# Altium PCB G118_9563_Demo.PcbDoc
Units mm, origin at the board's own origin, x right, y up, seen from the top; angles counter-clockwise.
Board outline 134.11 x 69.34 mm, 2 copper layers (Top Layer, Bottom Layer); 102 components, 94 nets, 337 pads, 209 vias.
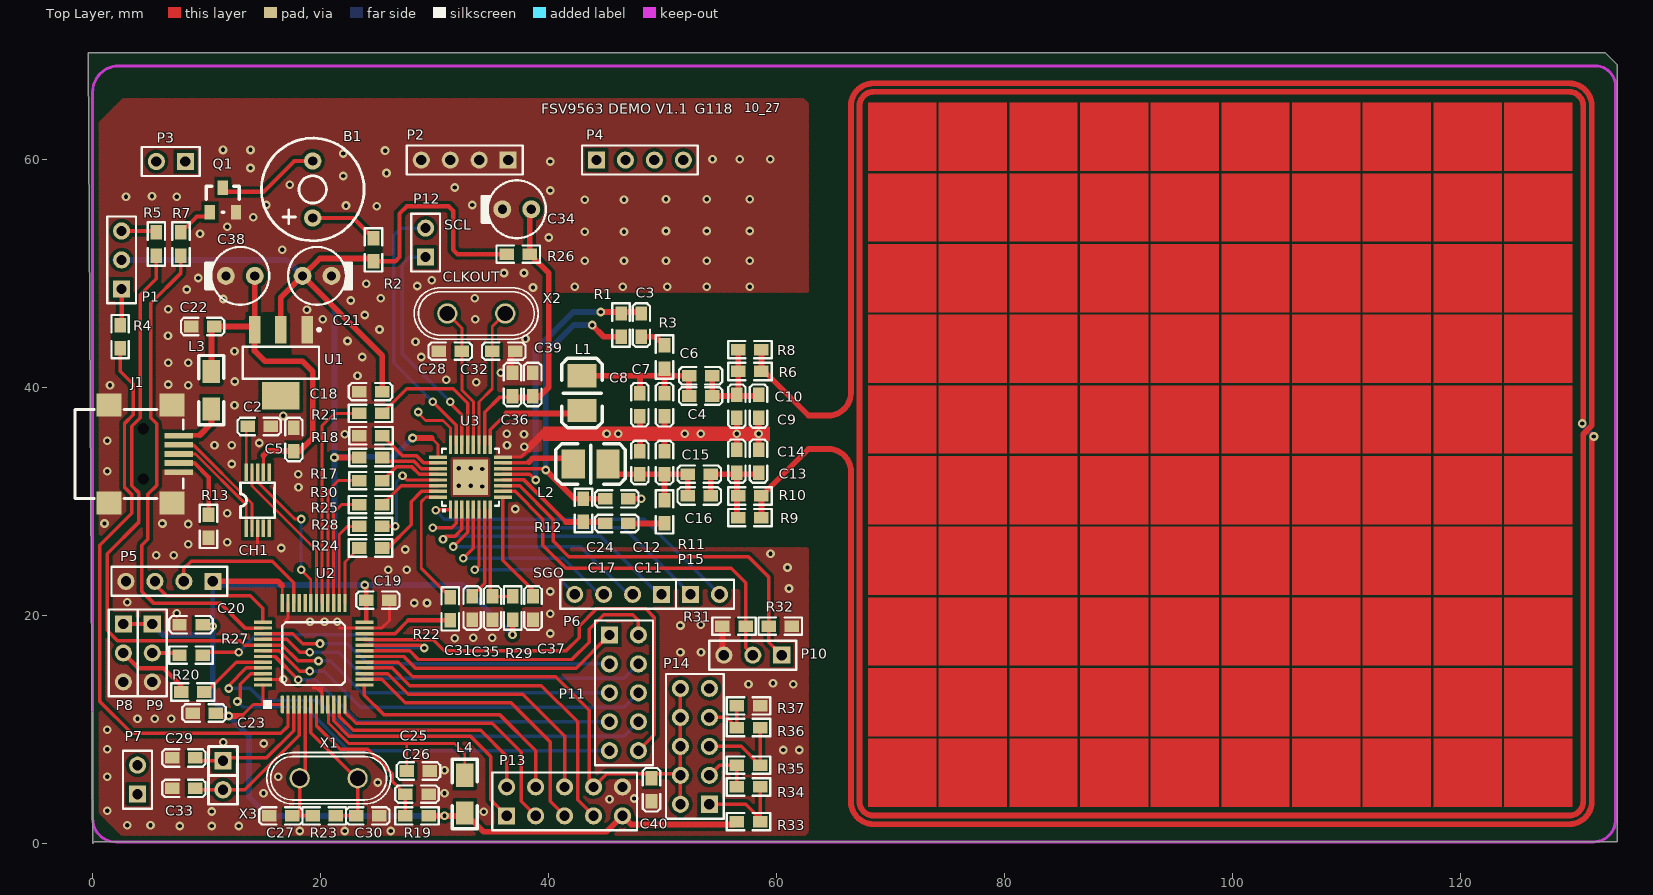
[diagram p0: Top Layer view]
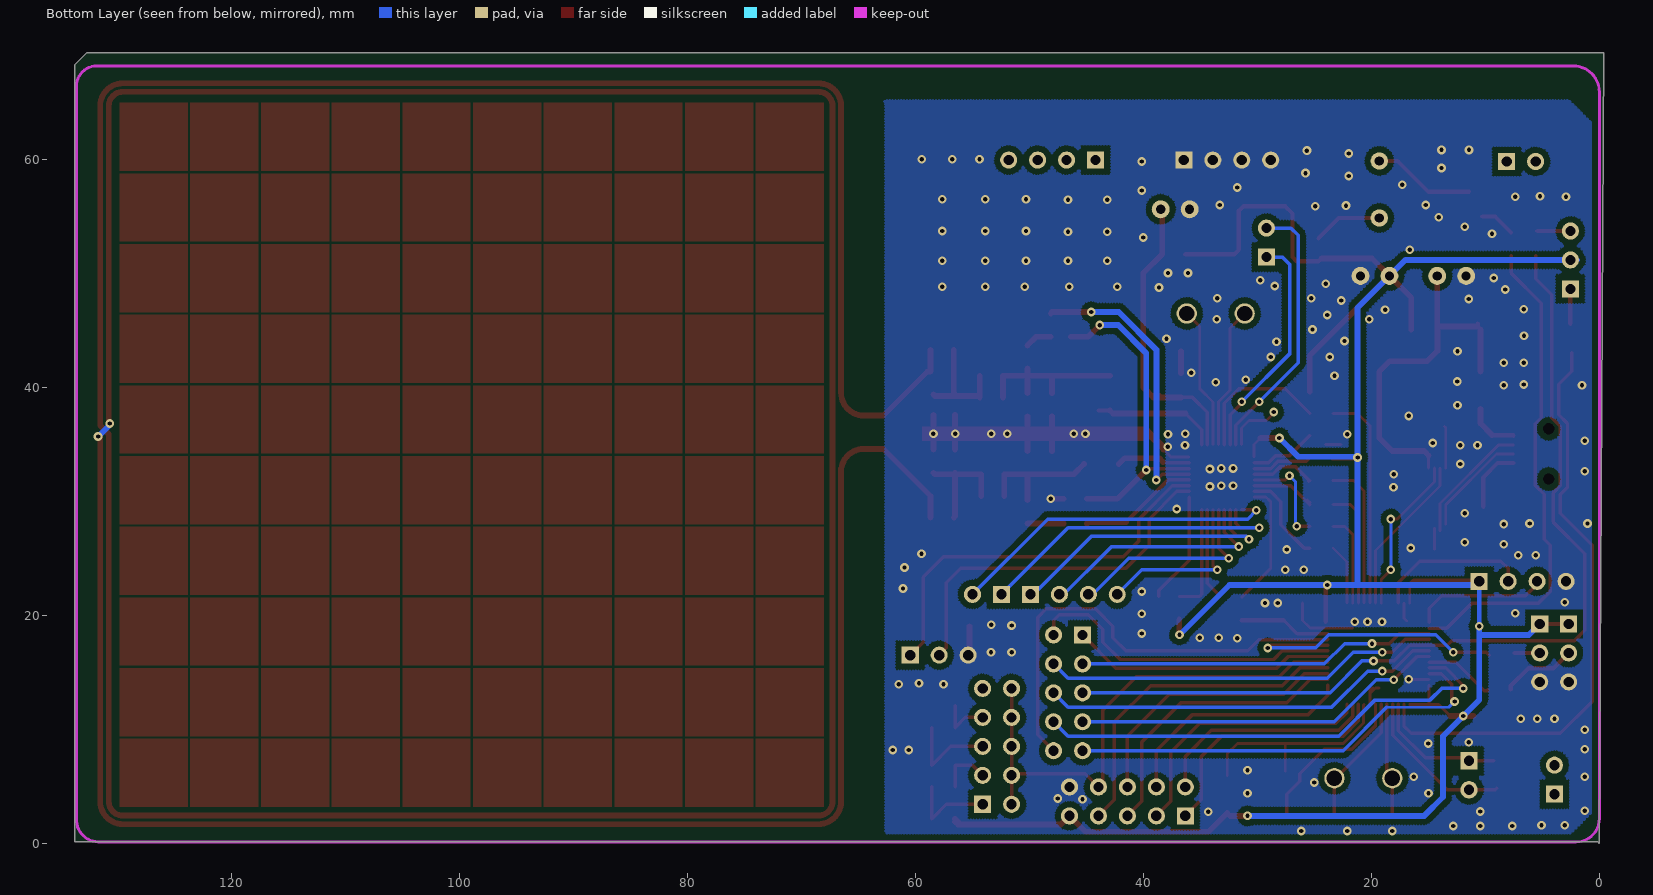
[diagram p1: Bottom Layer view, seen from below]

## Layer stack, top to bottom
Top Solder: solder mask 0.0102, Solder Resist, Dk 3.5
Top Layer: signal copper 0.0356
Dielectric1: dielectric 0.32, FR-4, Dk 4.8
Bottom Layer: signal copper 0.0356
Bottom Solder: solder mask 0.0102, Solder Resist, Dk 3.5

## Board outline
0,0 0.127,0.127 133.731,0.127 133.731,68.326 133.604,68.453 132.715,69.342 -0.381,69.342
cut-out: -65,-40.825 -64.746,-40.825 -64.746,-40.571 -65,-40.571

## Design rules (kind name [scope] priority, off if disabled: settings)
Clearance Clearance_5 [InNamedPolygon('TopLayerGND')] p1: gap=0.508
Clearance Clearance_4 [InNamedPolygon('BottomLayerGND')] p2: gap=0.508
Clearance Clearance_3 [InNamedPolygon('TopLayerGND')] p3: gap=0.508
Clearance Clearance_2 [InNamedPolygon('BottomLayerGND')] p4: gap=0.508
Clearance Clearance_1 [InNamedPolygon('BottomLayerGND')or InNamedPolygon('TopLayerGND')] p5: gap=0.508
Clearance [All] p6: gap=0.18
ComponentClearance [All] p1 off: gap=0.254 collisioncheckmode=3 verticalgap=0.254 showdistances=FALSE
Height [All] p1 off: minheight=0 maxheight=25.4 prefheight=12.7
HoleSize [All] p1 off: absolutevalues=TRUE maxlimit=2.54 minlimit=0.025 maxpercent=80.000 minpercent=20.000
MinimumSolderMaskSliver [All] p1: minsoldermaskwidth=0
PasteMaskExpansion [All] p1 off: expansion=0
PlaneConnect [All] p1: planeconnectstyle=Direct reliefexpansion=0.508 reliefentries=4 reliefconductorwidth=0.254 reliefairgap=0.254
PolygonConnect [All] p1: connectstyle=Direct reliefconductorwidth=0.254 reliefentries=4 polygonreliefangle="90 Angle" airgapwidth=0.254
RoutingVias [All] p1: holewidth=0.381 width=0.762 viastyle="Through Hole" minholewidth=0.381 minwidth=0.762 maxholewidth=0.762 maxwidth=1.27
SilkToSilkClearance [All] p1 off: silktosilkclearance=0.254
SilkToSolderMaskClearance SilkscreenOverComponentPads [IsPad] p1 off: minsilkscreentomaskgap=0.254 clearancetoexposedcopper=TRUE
SolderMaskExpansion [All] p1 off: expansion=0.102
Width [All] p1: maxlimit=0.508 minlimit=0.203 preferedwidth=0.254
22 further rules are at their usual default settings.

## Components (designator, comment, footprint, x,y, rotation, side; value= is the part's Value field where it differs from the comment)
B1 "BELL" BELL_S 19.304,54.864 r90 top
C2 "0.1uF" 0704C 13.589,36.576 r0 top
C3 "Cap Semi" 0704C 48.133,44.45 r90 top
C4 "Cap Semi" 0704C 52.324,39.243 r0 top
C5 "0.1uF" 0704C 17.653,34.417 r90 top
C6 "Cap Semi" 0704C 54.356,41.021 r180 top
C7 "Cap Semi" 0704C 48.006,39.497 r270 top
C8 "Cap Semi" 0704C 50.165,39.497 r270 top
C9 "Cap Semi" 0704C 56.515,39.37 r270 top
C10 "Cap Semi" 0704C 58.42,39.37 r270 top
C11 "Cap Semi" 0704C 48.006,34.417 r270 top
C12 "Cap Semi" 0704C 50.165,34.417 r270 top
C13 "Cap Semi" 0704C 56.515,34.544 r270 top
C14 "Cap Semi" 0704C 58.42,34.544 r270 top
C15 "Cap Semi" 0704C 54.229,32.385 r180 top
C16 "Cap Semi" 0704C 52.197,30.48 r0 top
C17 "Cap Semi" 0704C 46.99,28.067 r180 top
C18 "0.1uF" 0704C 25.4,39.624 r180 top
C19 "0.1uF" 0704C 24.003,21.336 r0 top
C20 "0.1uF" 0704C 9.652,19.177 r180 top
C21 "10uF" RB.1/.2 18.415,49.784 r0 top
C22 "1uF" 0704C 10.668,45.339 r180 top
C23 "0.1uF" 0704C 10.795,11.43 r180 top
C24 "100NF" 0704C 44.958,30.226 r0 top
C25 "0.1uF" 0704C 29.591,6.35 r180 top
C26 "0.1uF" 0704C 29.464,4.318 r180 top
C27 "20pF" 0704C 15.494,2.413 r0 top
C28 "20pF" 0704C 30.353,43.18 r0 top
C29 "20pF" 0704C 6.985,7.493 r0 top
C30 "20pF" 0704C 25.146,2.413 r180 top
C31 "Cap Semi" 0704C 33.298,19.627 r90 top
C32 "20pF" 0704C 37.084,43.18 r180 top
C33 "20pF" 0704C 6.985,4.826 r0 top
C34 "10uF" RB.1/.2 38.481,55.626 r180 top
C35 "0.1uF" 0704C 35.076,21.659 r270 top
C36 "0.1uF" 0704C 36.83,39.243 r90 top
C37 "Cap Semi" 0704C 38.632,19.627 r90 top
C38 "10uF" RB.1/.2 14.224,49.784 r180 top
C39 "10uF" 0704C 38.608,39.243 r90 top (schematic designator C36)
C40 "0.1uF" 0704C 49.022,5.715 r270 top (schematic designator C16)
CH1 "CH340E" msop-10 13.716,29.337 r90 top
J1 "mini usb" usb_mini 4.445,34.163 r270 top
L1 "Inductor" 1210L 42.926,37.973 r90 top
L2 "Inductor" 1210L 42.164,33.274 r0 top
L3 "10uH" 1206 10.414,38.1 r90 top
L4 "10uH" 1206 32.639,2.667 r90 top
P1 "LED" HDR1X3 2.54,48.641 r90 top
P2 "GND" HDR1X4 36.449,59.944 r180 top
P3 "NC" HDR1X2 8.128,59.817 r180 top
P4 "NC" HDR1X4 44.196,59.944 r0 top
P5 "SWD" HDR1X4 10.541,22.987 r180 top
P6 "NC" HDR1X4 49.911,21.844 r180 top
P7 "NC" HDR1X2 3.937,4.318 r90 top
P8 "BOOT0" HDR1X3 2.691,19.246 r270 top
P9 "BOOT1" HDR1X3 5.231,19.246 r270 top
P10 "BOOT0" HDR1X3 60.452,16.51 r180 top
P11 "PB" HDR2X5 45.339,18.288 r270 top
P12 "NC" HDR1X2 29.21,51.435 r90 top
P13 "PA" HDR2X5 36.322,2.413 r0 top
P14 "PA" HDR2X5 54.102,3.429 r90 top
P15 "Comment" HDR1X2 52.451,21.844 r0 top
Q1 "NPN SS8050" SOT-23-2 10.287,55.372 r0 top
R1 "Res3" 0704 46.355,46.482 r270 top
R2 "15" 0704 24.638,51.054 r90 top
R3 "Res3" 0704 50.165,41.656 r90 top
R4 "1K" 0704 2.413,45.466 r270 top
R5 "1K" 0704 5.588,51.562 r90 top
R6 "Res3" 0704 58.674,41.402 r180 top
R7 "4.7K" 0704 7.747,51.562 r90 top
R8 "Res3" 0704 58.674,43.307 r180 top
R9 "Res3" 0704 58.674,28.575 r180 top
R10 "Res3" 0704 58.674,30.48 r180 top
R11 "Res3" 0704 50.165,28.067 r90 top
R12 "Res3" 0704 43.053,28.194 r90 top
R13 "NC" 0704 10.16,28.829 r270 top
R17 "0" 0704 25.424,33.851 r180 top
R18 "0" 0704 25.424,35.756 r180 top
R19 "10K" 0704 29.464,2.413 r180 top
R20 "10K" 0704 7.771,13.277 r0 top
R21 "200" 0704 23.368,37.719 r0 top
R22 "200" 0704 31.369,19.558 r90 top
R23 "1M" 0704 21.336,2.413 r180 top
R24 "200" 0704 23.368,25.908 r0 top
R25 "200" 0704 23.368,29.718 r0 top
R26 "0" 0704 38.354,51.689 r180 top
R27 "10K" 0704 7.62,16.51 r0 top
R28 "200" 0704 23.368,27.813 r0 top
R29 "0" 0704 36.854,19.627 r90 top
R30 "200" 0704 23.392,31.819 r0 top
R31 "1K" 0704 55.245,19.05 r0 top
R32 "1K" 0704 61.341,19.05 r180 top
R33 "1K" 0704 58.547,1.905 r180 top
R34 "1K" 0704 56.515,4.953 r0 top
R35 "1K" 0704 58.547,6.858 r180 top
R36 "1K" 0704 56.515,10.16 r0 top
R37 "1K" 0704 58.547,12.065 r180 top
U1 "LM1117IMP-3.3" MP04A_N 16.51,42.164 r270 top
U2 "STM32F103C8T6" LQFP48L 16.637,12.192 r0 top
U3 "CLRC663" QFN-32 31.393,29.279 r0 top
X1 "8M" CRYSTAL 23.241,5.715 r180 top
X2 "27.12M" CRYSTAL 31.115,46.482 r0 top
X3 "32.768K" SIP2 11.43,7.239 r270 top

## Footprints (in the part's own frame and the unit in brackets; to place one, negate y for a bottom-side part, rotate by r counter-clockwise, add the part's x,y. Pads: shape width x height; smd on the part's side, far side on the other; paste and mask are expansions set on the pad)
0704 [mil]
  rect 50x40 smd: 1(0,0) 2(80,0)
  silkscreen extent -35,-30 115,30
0704C [mil]
  rect 50x40 smd: 1(0,0) 2(80,0)
  silkscreen extent -35,-30 115,30
1206 [mil]
  rect 80x60 smd: 1(0,0) 2(130,0)
  silkscreen extent -55,-43 185,43
1210L [mil]
  rect 80x100 smd: 1(0,0) 2(120,0)
  silkscreen extent -60,-70 180,70
BELL_S [mil]
  round 60 hole 31.5: 1(0,0) 2(196.85,0)
  silkscreen extent -79,-177 276,177
CRYSTAL [mil]
  round 70 hole 53: 1(0,0) 2(200,0)
  silkscreen extent -115,-89 314,89
HDR1X2 [mm] "Connector; Header; 2 Position"
  rect 1.5x1.5 hole 0.9: 1(0,0)
  round 1.5 hole 0.9: 2(2.54,0)
  silkscreen extent -1.27,-1.27 3.81,1.27
HDR1X3 [mm] "Connector; Header; 3 Position"
  rect 1.5x1.5 hole 0.9: 1(0,0)
  round 1.5 hole 0.9: 2(2.54,0) 3(5.08,0)
  silkscreen extent -1.27,-1.27 6.35,1.27
HDR1X4 [mm] "Connector; Header; 4 Position"
  rect 1.5x1.5 hole 0.9: 1(0,0)
  round 1.5 hole 0.9: 2(2.54,0) 3(5.08,0) 4(7.62,0)
  silkscreen extent -1.27,-1.27 8.89,1.27
HDR2X5 [mm] "Connector; Header; 5x2 Position"
  rect 1.5x1.5 hole 0.9: 1(0,0)
  round 1.5 hole 0.9: 2(0,2.54) 3(2.54,0) 4(2.54,2.54) 5(5.08,0) 6(5.08,2.54) 7(7.62,0) 8(7.62,2.54) 9(10.16,0) 10(10.16,2.54)
  silkscreen extent -1.27,-1.27 11.43,3.81
LQFP48L [mm]
  oval 0.3x1.6 smd: 1(0,0)
  rect 0.3x1.6 smd: 2(0.5,0) 3(1,0) 4(1.5,0) 5(2,0) 6(2.5,0) 7(3,0) 8(3.5,0) 9(4,0) 10(4.5,0) 11(5,0) 12(5.5,0) 25(5.5,8.9) 26(5,8.9) 27(4.5,8.9) 28(4,8.9) 29(3.5,8.9) 30(3,8.9) 31(2.5,8.9) 32(2,8.9) 33(1.5,8.9) 34(1,8.9) 35(0.5,8.9) 36(0,8.9)
  rect 1.6x0.3 smd: 13(7.2,1.7) 14(7.2,2.2) 15(7.2,2.7) 16(7.2,3.2) 17(7.2,3.7) 18(7.2,4.2) 19(7.2,4.7) 20(7.2,5.2) 21(7.2,5.7) 22(7.2,6.2) 23(7.2,6.7) 24(7.2,7.2) 37(-1.7,7.2) 38(-1.7,6.7) 39(-1.7,6.2) 40(-1.7,5.7) 41(-1.7,5.2) 42(-1.7,4.7) 43(-1.7,4.2) 44(-1.7,3.7) 45(-1.7,3.2) 46(-1.7,2.7) 47(-1.7,2.2) 48(-1.7,1.7)
  silkscreen extent -1.7,-0.4 5.5,7.2
MP04A_N [mm] "SOT223, 4-Leads, Body 6.5x3.5mm, Pitch 2.3mm, Lead Span 7mm, IPC Medium Density"
  rect 2.4x1 smd: 1(-2.9,2.3) 2(-2.9,0) 3(-2.9,-2.3)
  rect 2.4x3.3 smd: 4(2.9,0)
  silkscreen extent -3.02,-3.35 1.4,3.48, body extent -1.85,-3.35 1.85,3.35, height 1.8
msop-10 [mil]
  rect 61.02x12 smd: 1(-66.5,9.37) 2(-66.5,-10.32) 3(-66.5,-30) 4(-66.5,-49.69) 5(-66.5,-69.37) 6(126.5,-69.37) 7(126.5,-49.69) 8(126.5,-30) 9(126.5,-10.32) 10(126.5,9.37)
  silkscreen extent -30,-89 90,30
QFN-32 [mm]
  rect 3.1x3.1 smd: 0(1.75,2.85)
  rect 0.3x1.6 smd: 1(0,0) 2(0.5,0) 3(1,0) 4(1.5,0) 5(2,0) 6(2.5,0) 7(3,0) 8(3.5,0) 17(3.5,5.7) 18(3,5.7) 19(2.5,5.7) 20(2,5.7) 21(1.5,5.7) 22(1,5.7) 23(0.5,5.7) 24(0,5.7)
  rect 1.6x0.3 smd: 9(4.6,1.1) 10(4.6,1.6) 11(4.6,2.1) 12(4.6,2.6) 13(4.6,3.1) 14(4.6,3.6) 15(4.6,4.1) 16(4.6,4.6) 25(-1.1,4.6) 26(-1.1,4.1) 27(-1.1,3.6) 28(-1.1,3.1) 29(-1.1,2.6) 30(-1.1,2.1) 31(-1.1,1.6) 32(-1.1,1.1)
  silkscreen extent -0.76,-0.25 4.25,5.35
RB.1/.2 [mil]
  round 62 hole 31.5: 1(0,0) 2(100,0)
  silkscreen extent -50,-100 170,100
SIP2 [mil]
  rect 60x60 hole 35.43: 1(0,0)
  round 60 hole 35.43: 2(100,0)
  silkscreen extent -50,-50 150,50
SOT-23-2 [mil]
  rect 36x50 smd: 1(45,85) 2(0,0) 3(90,0)
  silkscreen extent -13,0 102,90
usb_mini [mm]
  round 0 hole 1: 0(-2.2,0) 0(2.2,0)
  rect 0.5x2.5 smd: 1(-1.6,3.1) 2(-0.8,3.1) 3(0,3.1) 4(0.8,3.1) 5(1.6,3.1)
  rect 2x2.2 smd: 6(-4.3,2.5) 7(-4.3,-3) 8(4.3,2.5) 9(4.3,-3)
  silkscreen extent -3.9,-6 3.9,3.5

## Part data
C2 C5 C18 C19 C20 C22 C23 C25 C26 C27 C28 C29 C30 C32 C33 C35 C36 C39 C40: library part Capacitor
C3 C4 C6 C7 C8 C9 C10 C11 C12 C13 C14 C15 C16 C17 C31 C37: "Capacitor (Semiconductor SIM Model)"
C21 C34 C38: library part CapPolar
C24: library part "Cap Semi", "Capacitor (Semiconductor SIM Model)"
J1: library part MINI_USB
L3 L4: library part Inductor
P1 P8 P9 P10: library part "Header 3", "Header, 3-Pin"
P2 P4 P5 P6: library part "Header 4", "Header, 4-Pin"
P3 P7 P12: library part "Header 2", "Header, 2-Pin"
P11 P13 P14: library part "Header 5X2", "Header, 5-Pin, Dual row"
R1 R3 R6 R8 R9 R10 R11 R12: "Resistor"
R2 R4 R5 R7 R13 R17 R18 R19 R20 R21 R22 R23 R24 R25 R26 R27 R28 R29 R30 R31 R32 R33 R34 R35 R36 R37: library part RES
U1: "800mA Low-Dropout Linear Regulator"
U2: library part stm32f103c8t6
U3: "NFC DRIVER"
X1 X2 X3: library part Crystal

## Via types
v1: diameter 0.762, hole 0.381, Top Layer to Bottom Layer, tented both sides, 179 vias
v2: diameter 0.762, hole 0.381, Top Layer to Bottom Layer, 30 vias

## Nets (pads, with @x,y where several pads share a name; then routed paths per layer and width w, separated by ;. In a path a pad name is that pad's centre, name@x,y a point inside that pad or via, vN(x,y) a via of type N, cw(c..) or ccw(c..) an arc to the next point about the centre after c; other vN are vias at no path point)
AUX1: P10.2 R31.2 U3.10 | length 32.4
  Top Layer w0.305: U3.10 37.066,30.879 39.497,28.448 39.497,26.162 41.529,24.13 56.007,24.13 57.277,22.86 R31.2@57.277,19.177 ; R31.2 57.277,17.145 P10.2
AUX2: P10.1 R32.2 U3.11 | length 35
  Top Layer w0.305: U3.11 37.455,31.379 40.386,28.448 40.386,26.543 41.783,25.146 57.531,25.146 59.309,23.368 R32.2@59.309,19.177 ; R32.2 59.309,17.653 P10.1
AVDD: C37.2 U3.9 | length 9.8
  Top Layer w0.305: U3.9 35.993,24.84 38.632,22.201 C37.2
CLKOUT: P12.1 U3.22 | length 20.3
  Top Layer w0.305: v2(31.369,38.735) 31.369,38.608 32.393,37.584 U3.22
  Bottom Layer w0.305: P12.1 27.813,51.435 27.178,50.8 27.178,42.926 v2(31.369,38.735)
DVDD: C31.2 U3.7 | length 8.1
  Top Layer w0.254: C31.2 33.298,21.741 C31.2@33.465,21.907
  Top Layer w0.305: C31.2@33.465,21.907 34.393,22.836 U3.7
GND: C2.2 C5.2 C7.2 C8.2 C9.2 C10.2 C11.1 C12.1 C13.1 C14.1 C18.2 C19.2 C20.2 C21.2 C22.2 C23.2 C24.2 C25.1 C26.1 C27.1 C28.1 C29.1 C30.1 C31.1 C32.1 C33.1 C34.2 C35.2 C36.2 C37.1 C38.2 C39.2 C40.2 CH1.3 J1.5 J1.6 J1.7 J1.8 J1.9 P2.1 P2.2 P2.3 P2.4 P5.4 P8.3 P9.3 P10.3 P13.10 Q1.3 R13.2 R18.2 R31.1 R32.1 R37.1 U1.1 U2.8 U2.23 U2.35 U2.47 U3.0 U3.16 | length 42
  Top Layer w0.254: 14.478,25.805 CH1.3 ; U2.47 v1(16.723,14.392) ; 16.891,19.5 17.137,19.746 U2.35 ; 19.328,13.627 19.647,13.627 20.137,13.137 ; 19.852,13.627 20.137,13.342 ; 20.09,13.627 20.137,13.58 20.137,13.342 ; U2.8 20.137,13.137 ; 21.645,18.892 U2.23 25.369,18.892 26.035,19.558 C19.2@26.035,21.082 ; 22.675,34.994 24.027,34.994 ; U3.16 37.562,33.879 38.227,34.544 ; 20.137,13.137 20.137,13.342
  Top Layer w0.508: C36.2@36.703,41.275 C32.1@36.703,43.18 ; v1@38.1,34.671 39.497,36.068 ; 38.227,34.544 39.37,35.687 40.386,35.687 ; 40.132,36.322 39.751,36.322 39.497,36.068 ; 40.259,36.068 39.497,36.068 ; C24.2 v1(48.133,30.226) ; C11.1 C7.2 ; C12.1 C8.2 ; P10.3@55.245,16.637 R31.1 ; C13.1 v1(56.515,35.941) C9.2 C9.2@56.515,37.592 ; C14.1 v1(58.42,35.941) C10.2 C10.2@58.42,37.592
  other v1: 18.161,1.085 22.122,1.079 26.162,1.085 7.644,1.524 10.438,1.524 12.827,1.524 3.048,1.593 5.08,1.593 10.438,2.794 34.314,2.781 1.27,2.863 45.339,3.879 47.522,3.937 14.986,4.387 30.861,4.387 25.019,5.334 1.27,5.842 16.28,5.842 30.861,6.419 60.579,8.197 61.976,8.197 1.27,8.255 15.01,8.763 11.454,8.865 1.27,9.975 3.937,10.922 5.461,10.922 6.882,10.922 57.531,13.97 61.468,13.97 59.69,14.039 51.562,16.764 53.364,16.764 31.774,17.983 33.401,18.034 35.052,18.034 40.132,18.415 51.562,19.119 53.34,19.177 19.074,19.431 20.344,19.431 21.463,19.431 40.132,20.135 7.366,20.193 28.218,21.082 29.337,21.082 3.048,21.151 40.156,22.098 61.087,22.352 25.932,24.003 27.559,24.003 60.96,24.199 5.588,25.273 7.112,25.273 59.46,25.4 27.432,25.781 16.534,25.908 8.382,26.231 11.811,26.416 8.382,28.009 1.04,28.067 6.12,28.067 11.811,28.956 37.084,29.337 18.058,31.242 34.163,31.311 32.131,31.369 33.171,31.369 18.034,32.385 1.294,32.639 34.163,32.835 32.131,32.893 33.171,32.893 12.216,33.274 37.87,34.798 10.692,34.925 12.216,34.925 36.346,34.925 14.605,35.121 1.27,35.306 22.111,35.883 37.846,35.883 36.322,35.941 45.085,35.941 46.101,35.941 51.943,35.941 53.34,35.941 16.732,37.498 12.446,38.423 1.524,40.201 8.382,40.201 6.628,40.259 33.655,40.455 12.47,40.513 31.012,40.665 23.241,41.021 35.814,41.275 6.628,42.164 8.382,42.164 23.646,42.672 28.829,42.672 12.446,43.18 28.321,44.011 22.352,44.069 37.973,44.265 6.604,44.519 25.17,45.085 20.193,45.974 33.552,45.974 23.876,46.355 18.796,46.805 6.628,46.863 22.63,47.625 11.454,47.752 25.273,47.821 33.528,47.821 8.255,48.583 38.632,48.768 42.291,48.837 46.506,48.837 50.419,48.837 53.872,48.837 57.658,48.837 28.472,48.895 24.003,49.091 29.742,49.403 9.271,49.599 36.092,50.038 37.846,50.038 43.18,51.112 46.609,51.112 50.292,51.112 53.872,51.112 57.658,51.112 16.637,52.07 40.005,53.155 9.422,53.467 43.18,53.663 46.609,53.663 50.292,53.721 53.872,53.721 57.658,53.721 11.811,54.102 14.097,54.933 24.916,55.88 22.225,55.949 15.24,56.007 33.298,56.007 43.18,56.457 46.609,56.457 50.292,56.515 53.872,56.515 57.658,56.515 2.921,56.711 7.366,56.711 5.207,56.769 40.132,57.277 31.774,57.531 17.296,57.79 21.971,58.547 25.781,58.801 13.843,59.251 40.156,59.817 54.38,60.013 56.769,60.013 59.436,60.013 21.971,60.521 25.654,60.775 11.43,60.833 13.843,60.833
IF0: R30.2 U3.28 | length 5.7
  Top Layer w0.305: R30.2@25.493,31.75 R30.2 26.625,33.02 28.02,33.02 28.661,32.379 U3.28
IF1: R28.2 U3.29 | length 9.1
  Top Layer w0.254: v2(27.178,32.258) 27.557,31.879 U3.29
  Top Layer w0.305: R28.2 v2(26.543,27.813)
  Bottom Layer w0.254: v2@26.67,27.813 26.67,31.75 v2(27.178,32.258)
IF2: R25.2 U3.30 | length 5.9
  Top Layer w0.305: R25.2 27.061,31.379 U3.30 ; R25.2@25.424,29.914 R25.2@25.619,30.109
IF3: R24.2 U3.31 | length 8.1
  Top Layer w0.305: R24.2 25.908,25.908 27.94,27.94 27.94,29.972 28.847,30.879 U3.31
IFSEL0: R18.1 U3.26 | length 5.9
  Top Layer w0.305: R18.1 27.195,33.985 28.419,33.985 29.025,33.379 U3.26
IFSEL1: R17.1 U3.27 | length 5.3
  Top Layer w0.305: R17.1 25.772,33.503 28.219,33.503 28.843,32.879 U3.27
IRQ: R22.2 U3.32 | length 11.1
  Top Layer w0.254: U3.32 29.236,30.379 28.829,29.972 28.829,24.13 R22.2
NetB1_1: B1.1 R2.2 | length 5.6
  Top Layer w0.381: B1.1@19.812,54.864 22.86,54.864 R2.2
NetB1_2: B1.2 Q1.1 | length 9.5
  Top Layer w0.381: Q1.1@11.43,57.15 14.986,57.15 17.7,59.864 B1.2@19.812,59.864
NetC2_1: C2.1 CH1.10 | length 3.7
  Top Layer w0.254: CH1.10@13.478,32.931 13.478,36.465 C2.1
NetC3_1: C3.1 R3.2 | length 2.3
  Top Layer w0.508: C3.1 49.403,44.45 R3.2
NetC4_1: C4.1 C6.2 C7.1 C8.1 L1.2 R3.1 | length 15
  Top Layer w0.508: L1.2 48.006,41.021 ; C7.1 48.006,41.021 ; C8.1 R3.1@50.165,41.021 ; R3.1 R3.1@50.165,41.021 ; C4.1@52.324,39.116 C4.1 C6.2 R3.1@50.165,41.021 ; 48.006,41.021 R3.1@50.165,41.021
NetC4_2: C4.2 C6.1 C9.1 C10.1 R6.2 R8.2 | length 10
  Top Layer w0.508: C4.2@54.356,39.116 C4.2 ; C6.1 C4.2 ; C9.1 56.642,39.497 R6.2 R8.2 ; C10.1 58.293,39.243 C4.2
NetC11_2: C11.2 C12.2 C15.2 C16.1 L2.2 R11.2 | length 11.5
  Top Layer w0.508: L2.2 46.101,32.385 C11.2 C12.2 ; R11.2 C12.2 ; C16.1 C15.2 C12.2
NetC13_2: C13.2 C14.2 C15.1 C16.2 R9.2 R10.2 | length 10.1
  Top Layer w0.508: C16.2 C15.1 C13.2@56.515,32.385 ; C13.2 C13.2@56.515,32.385 ; R9.2 56.515,28.702 C13.2@56.515,32.385 ; C14.2 58.293,32.385 56.642,32.385 C13.2@56.515,32.385
NetC17_1: C17.1 R11.1 | length 3.2
  Top Layer w0.508: C17.1 R11.1
NetC25_2: C25.2 L4.2 U2.9 | length 19
  Top Layer w0.254: U2.9 20.68,12.149 20.68,10.551 22.467,8.763 27.559,8.763 ; C25.2 27.559,8.763 ; L4.2 32.639,7.874 31.75,8.763 27.559,8.763
NetC26_2: C26.2 R19.2 U2.7 | length 14.5
  Top Layer w0.305: U2.7 19.637,10.335 21.717,8.255 24.13,8.255 26.289,6.096 26.289,5.461 C26.2 27.432,2.54 R19.2@27.559,2.413
NetC27_2: C27.2 R23.2 U2.5 X1.2 | length 11.1
  Top Layer w0.305: C27.2 R23.2 ; 18.161,2.413 X1.2 ; X1.2@18.637,6.191 U2.5
NetC29_2: C29.2 U2.3 X3.1 | length 11.8
  Top Layer w0.305: C29.2@9.271,7.239 X3.1 11.684,7.493 15.24,7.493 17.637,9.89 U2.3
NetC30_2: C30.2 R23.1 U2.6 X1.1 | length 13.1
  Top Layer w0.305: U2.6 19.137,9.692 X1.1@23.114,5.715 ; R23.1 C30.2 ; C30.2@23.241,2.54 X1.1
NetC33_2: C33.2 U2.4 X3.2 | length 13.9
  Top Layer w0.305: C33.2 9.144,4.699 X3.2 13.335,4.699 18.137,9.501 U2.4
NetC34_1: C34.1 C36.1 C39.1 R26.1 U3.18 | length 26.4
  Top Layer w0.305: U3.18 34.393,37.822 35.687,39.116 C36.1@36.703,39.116
  Top Layer w0.508: C36.1@36.703,39.116 39.116,39.116 40.005,40.005 40.005,50.038 R26.1 38.354,55.499 C34.1 ; C39.1 39.243,39.243
NetC35_1: C35.1 R29.2 U3.8 | length 9.5
  Top Layer w0.254: C35.1 R29.2
  Top Layer w0.305: U3.8 34.893,21.842 C35.1
NetJ1_1: J1.1 L3.1 | length 4.6
  Top Layer w0.381: J1.1 7.545,35.807 9.391,35.807
  Top Layer w0.508: 9.391,35.807 10.414,36.83 L3.1
NetJ1_4: J1.4 R13.1 | length 5.7
  Top Layer w0.381: J1.4 8.928,33.363 10.184,32.107 10.184,29.533
NetP1_1: P1.1 R4.1 | length 3
  Top Layer w0.381: R4.1@2.54,45.593 P1.1
NetP1_3: P1.3 R5.2 | length 2.9
  Top Layer w0.381: P1.3 R5.2@5.461,53.721
NetP8_2: P8.2 R20.1 | length 6.6
  Top Layer w0.381: P8.2 4.03,15.367 6.223,15.367 7.771,13.819 R20.1@7.771,13.531
NetP9_2: P9.2 R27.1 | length 2.2
  Top Layer w0.381: P9.2 R27.1@7.424,16.706
NetQ1_2: Q1.2 R7.2 | length 3.1
  Top Layer w0.381: R7.2 9.144,54.991 Q1.2@10.287,54.991
NetR6_1: R6.1 R8.1 R9.1 R10.1 | length 527.2
  Top Layer w0.508: R9.1 R10.1 62.801,34.607 64.516,34.607 cw(c64.516,32.607) 66.516,32.607 ; R8.1 R6.1 58.928,41.402 62.801,37.529 64.516,37.529 ccw(c64.516,39.529) 66.516,39.529 66.516,64.685 cw(c68.516,64.685) 68.516,66.685 129.516,66.685 cw(c129.516,64.685) 131.516,64.685 131.516,36.647 130.766,35.897 130.766,3.683 cw(c129.516,3.683) 129.516,2.433 ; 66.516,32.861 66.516,3.685 ccw(c68.516,3.685) 68.516,1.685 129.516,1.685 ccw(c129.516,3.685) 131.516,3.685 131.516,35.758 v2@131.572,35.814 ; 129.514,2.435 68.516,2.435 cw(c68.516,3.685) 67.266,3.685 67.266,64.685 cw(c68.516,64.685) 68.516,65.935 129.516,65.935 cw(c129.516,64.685) 130.766,64.685 v2@130.766,36.83
  Bottom Layer w0.508: v2@130.766,36.62 v2@131.516,35.87
  other v2: 131.699,35.687 130.683,36.83
NetR20_2: R20.2 U2.44 | length 6.2
  Top Layer w0.305: R20.2@9.803,13.486 9.803,13.404 10.102,13.404 12.59,15.892 U2.44
PA0: P13.1 U2.10 | length 22.3
  Top Layer w0.305: U2.10 21.137,10.74 22.479,9.398 33.147,9.398 34.925,7.62 34.925,3.81 P13.1
PA1: P13.2 U2.11 | length 19.9
  Top Layer w0.305: U2.11 21.637,11.129 22.86,9.906 34.036,9.906 36.322,7.62 P13.2
PA2: P13.3 U2.12 | length 23.7
  Top Layer w0.305: U2.12 22.137,11.518 23.114,10.541 35.052,10.541 37.592,8.001 37.592,3.683 P13.3
PA3: P13.4 U2.13 | length 21.1
  Top Layer w0.305: U2.13 23.837,12.993 25.527,11.303 35.687,11.303 38.862,8.128 P13.4
PA4: P13.5 U2.14 | length 25.6
  Top Layer w0.305: U2.14 25.359,14.392 27.432,12.319 36.703,12.319 40.132,8.89 40.132,3.683 P13.5
PA5: P13.6 U2.15 | length 24.3
  Top Layer w0.305: U2.15 23.854,14.875 25.892,14.875 27.686,13.081 37.719,13.081 41.402,9.398 P13.6
PA6: P13.7 U2.16 | length 29.5
  Top Layer w0.305: U2.16 26.264,15.392 27.813,13.843 39.37,13.843 42.545,10.668 42.545,3.81 P13.7
PA7: C40.1 P13.8 P14.2 P14.4 P14.6 P14.8 P14.10 U2.17 | length 46.2
  Top Layer w0.305: U2.17 23.854,15.875 26.797,15.875 28.067,14.605 40.64,14.605 43.561,11.684 P13.8@43.561,5.334 ; P13.8 45.085,6.096 P14.4@51.181,6.096 ; P14.4@51.181,5.588 P14.4 ; P14.2 P14.4 ; P14.10 P14.8 P14.6 P14.4
PA8: R21.1 U2.29 | length 19.2
  Top Layer w0.254: U2.29 20.137,36.647 21.209,37.719 R21.1
PA15: R7.1 U2.38 | length 43.3
  Top Layer w0.305: R7.1 7.747,50.038 5.08,47.371 5.08,37.338 5.612,36.806 5.612,31.393 4.85,30.631 4.85,26.694 4.318,26.162 4.318,22.098 5.334,21.082 11.176,21.082 13.366,18.892 U2.38
PB0: P11.1 U2.18 | length 23.1
  Top Layer w0.305: U2.18 27.296,16.392 28.321,15.367 42.418,15.367 P11.1
PB1: P11.2 U2.19 | length 28.1
  Top Layer w0.305: U2.19 27.812,16.892 28.575,16.129 42.037,16.129 43.561,17.653 43.561,18.796 44.831,20.066 47.371,20.066 47.879,19.558 P11.2
PB2: R27.2 U2.20 | length 26
  Top Layer w0.305: R27.2 9.906,16.764 v2(12.827,16.764) ; U2.20 28.836,17.392 v2(29.083,17.145)
  Bottom Layer w0.305: v2(12.827,16.764) 14.351,18.288 23.749,18.288 24.892,17.145 v2(29.083,17.145)
PB3: P11.3 U2.39 | length 31.5
  Top Layer w0.305: U2.39 17.549,18.392 18.415,17.526 v1(19.939,17.526)
  Bottom Layer w0.305: v1(19.939,17.526) 22.352,17.526 24.13,15.748 P11.3
PB4: P11.4 U2.40 | length 34.9
  Top Layer w0.305: U2.40 17.033,17.892 18.161,16.764 v1(19.05,16.764)
  Bottom Layer w0.305: v1(19.05,16.764) 21.59,16.764 23.876,14.478 46.609,14.478 P11.4
PB5: P11.5 R5.1 U2.41 | length 81.5
  Top Layer w0.305: R5.1 5.588,49.53 4.191,48.133 4.191,37.338 3.429,36.576 3.429,31.369 4.064,30.734 4.064,28.194 1.27,25.4 1.27,18.7 2.184,17.786 3.138,17.786 3.145,17.78 4.777,17.78 4.784,17.786 12.948,17.786 13.342,17.392 U2.41 16.644,17.392 18.034,16.002 v1(19.812,16.002)
  Bottom Layer w0.305: v1(19.812,16.002) 20.828,16.002 23.622,13.208 P11.5
PB6: P11.6 U2.42 | length 35.5
  Top Layer w0.305: U2.42 16.382,16.892 18.161,15.113 v1(19.05,15.113)
  Bottom Layer w0.305: v1(19.05,15.113) 20.32,15.113 23.495,11.938 46.609,11.938 P11.6
PB7: P11.7 U2.43 | length 32.8
  Top Layer w0.305: U2.43 15.993,16.392 v1(18.034,14.351)
  Bottom Layer w0.305: v1(18.034,14.351) 19.558,14.351 23.241,10.668 P11.7
PB8: P11.8 U2.45 | length 42.1
  Top Layer w0.305: v2(11.938,13.589) 11.938,13.843 13.487,15.392 U2.45
  Bottom Layer w0.305: v2(11.938,13.589) 13.843,13.589 14.859,12.573 19.685,12.573 22.86,9.398 46.609,9.398 P11.8
PB9: P11.9 U2.46 | length 38.2
  Top Layer w0.305: v2@12.954,12.573 12.954,13.97 13.876,14.892 U2.46
  Bottom Layer w0.254: v2(12.7,12.446) 13.208,11.938 18.669,11.938
  Bottom Layer w0.305: 18.669,11.938 22.479,8.128 P11.9
PB10: P11.10 U2.21 | length 40.6
  Top Layer w0.305: U2.21 23.854,17.875 29.877,17.875 30.861,16.891 41.529,16.891 42.672,18.034 42.672,19.05 44.196,20.574 48.514,20.574 49.276,19.812 49.276,9.525 P11.10
PB11: R22.1 U2.22 | length 8
  Top Layer w0.305: U2.22 26.52,18.392 27.686,19.558
  Top Layer w0.381: 27.686,19.558 R22.1
PB12: R24.1 U2.25 | length 5.3
  Top Layer w0.254: U2.25 22.137,24.677 R24.1
PB13: R28.1 U2.26 | length 8
  Top Layer w0.254: U2.26 21.637,27.098 22.352,27.813 R28.1
PB14: R25.1 U2.27 | length 10.4
  Top Layer w0.254: U2.27 21.137,29.011 21.844,29.718 R25.1
PB15: R30.1 U2.28 | length 13
  Top Layer w0.254: U2.28 20.637,30.924 21.532,31.819 R30.1
PC13: R4.2 U2.2 | length 52.6
  Top Layer w0.305: R4.2@2.413,43.053 2.413,41.402 3.556,40.259 3.556,37.592 2.794,36.83 2.794,31.242 3.429,30.607 3.429,28.956 0.635,26.162 0.635,12.446 3.429,9.652 16.51,9.652 17.137,10.279 U2.2
PDOWN: R21.2 U3.21 | length 12.5
  Top Layer w0.305: R21.2 27.559,39.878 31.623,39.878 32.893,38.608 U3.21
RX: CH1.8 U2.31 | length 14.1
  Top Layer w0.254: CH1.8@14.478,32.931 CH1.8 14.478,31.692 17.722,28.448 v2(18.288,28.448) ; v2(18.288,24.003) 19.137,23.154 U2.31
  Bottom Layer w0.254: v2(18.288,24.003) v2(18.288,28.448)
RXN: C3.2 R1.1 U3.13 | length 27
  Top Layer w0.305: U3.13 38.36,32.379 v2(38.862,31.877) ; R1.1 C3.2
  Top Layer w0.508: v2(44.577,46.609) 48.006,46.609 C3.2
  Bottom Layer w0.508: v2(38.862,31.877) 38.862,43.307 42.164,46.609 v2(44.577,46.609)
RXP: C17.2 R12.1 U3.12 | length 10.5
  Top Layer w0.305: U3.12 37.844,31.879 41.529,28.194
  Top Layer w0.508: 41.529,28.194 R12.1 44.831,28.194 C17.2
SCL: P12.2 U3.23 | length 23.7
  Top Layer w0.305: v2(29.845,38.735) 31.893,36.687 U3.23
  Bottom Layer w0.305: P12.2 27.051,53.975 26.416,53.34 26.416,42.164 v2(29.845,38.735)
SDA: U3.24 | length 4.9
  Top Layer w0.254: v2(28.575,37.846) 28.575,37.719 29.21,37.084 30.734,37.084 31.393,36.425 U3.24
SIGIN: P6.3 U3.5 | length 18.8
  Top Layer w0.305: v2(32.512,25.019) 33.393,25.9 U3.5
  Bottom Layer w0.305: v2(32.512,25.019) 41.275,25.019 44.831,21.463 P6.3@45.212,21.463
SIGOUT: P6.4 U3.6 | length 15.6
  Top Layer w0.305: v2(33.528,24.003) 33.893,24.368 U3.6
  Bottom Layer w0.305: v2(33.528,24.003) 40.132,24.003 P6.4@42.672,21.463
SWCLK: P5.3 U2.37 | length 11.6
  Top Layer w0.305: P5.3@5.461,22.733 6.477,21.717 13.843,21.717 14.937,20.623 U2.37
SWDIO: P5.2 U2.34 | length 13.6
  Top Layer w0.305: P5.2 8.001,24.13 8.636,24.765 15.748,24.765 17.637,22.876 U2.34
TCK: P6.2 U3.4 | length 21.8
  Top Layer w0.305: v2(31.623,26.035) 32.893,27.305 U3.4
  Bottom Layer w0.305: v2(31.623,26.035) 42.799,26.035 47.371,21.463 P6.2@47.752,21.463
TDI: P15.1 U3.2 | length 28.4
  Top Layer w0.305: v2(29.845,27.686) 31.496,27.686 31.893,28.083 U3.2
  Bottom Layer w0.305: v2(29.845,27.686) 46.609,27.686 P15.1
TDO: P15.2 U3.1 | length 29.2
  Top Layer w0.305: v2@30.168,29.279 U3.1
  Bottom Layer w0.305: v2(30.099,29.21) 30.861,28.448 48.387,28.448 P15.2
TMS: P6.1 U3.3 | length 25.8
  Top Layer w0.305: v2@30.81,26.746 v2(30.734,26.67) 30.988,26.924 31.75,26.924 32.393,27.567 U3.3
  Bottom Layer w0.305: v2(30.734,26.67) 30.988,26.924 44.577,26.924 50.038,21.463 P6.1@50.292,21.463
TX: CH1.9 U2.30 | length 15.8
  Top Layer w0.254: CH1.9@13.978,32.931 13.978,31.361 19.637,25.702 U2.30@19.637,21.463 ; U2.30 19.637,23.035
TX1: L1.1 U3.17 | length 11.2
  Top Layer w0.305: U3.17 34.893,36.29 36.322,37.719 ; 36.195,37.719 36.279,37.719
  Top Layer w0.381: L1.1 L1.1@43.942,37.973
  Top Layer w0.508: 36.279,37.719 36.322,37.719 42.672,37.719 L1.1
TX2: L2.1 U3.15 | length 6.5
  Top Layer w0.305: U3.15 38.205,33.379 38.289,33.463
  Top Layer w0.508: 38.289,33.463 38.608,33.782 41.656,33.782 L2.1
TYPEA: P14.1 R33.1 R34.2 | length 8.3
  Top Layer w0.305: P14.1@53.594,3.429 P14.1 57.277,3.429 58.547,2.159 R34.2
TYPEB: P14.3 R34.1 R35.2 | length 4.7
  Top Layer w0.305: P14.3 54.991,6.858 R35.2 R34.1
TYPEF: P14.5 R35.1 R36.2 | length 8.9
  Top Layer w0.305: P14.5@53.594,8.509 P14.5 56.896,8.509 R35.1 R36.2
TYPEV: P14.7 R36.1 R37.2 | length 5.2
  Top Layer w0.305: P14.7@53.594,11.049 P14.7 55.626,11.049 R36.1 R37.2
UD+: CH1.1 J1.3 | length 9.5
  Top Layer w0.254: J1.3 9.017,34.163 13.478,29.702 CH1.1@13.478,28.029
UD-: CH1.2 J1.2 | length 11
  Top Layer w0.254: J1.2 8.828,34.963 13.978,29.813 CH1.2@13.978,27.394
VCC5: C5.1 C22.1 C38.1 CH1.7 L3.2 U1.3 | length 31.9
  Top Layer w0.254: CH1.7@14.978,32.931 14.978,34.036
  Top Layer w0.381: C22.1@10.414,45.085 C22.1 C22.1@10.668,45.593
  Top Layer w0.508: L3.2 C22.1@10.414,45.085 ; C22.1 U1.3@13.935,45.339 ; C38.1 14.224,45.078 U1.3 14.21,43.194 15.113,42.291 18.415,42.291 19.304,41.402 19.304,35.56 18.161,34.417 C5.1 15.359,34.417 14.978,34.036
VDD: C18.1 C19.1 C20.1 C21.1 C23.1 L4.1 P1.2 P5.1 P8.1 P9.1 P13.9 R2.1 R17.2 R19.1 R26.2 R29.1 R33.2 U1.2 U2.1 U2.24 U2.36 U2.48 U3.25 | length 227.2
  Top Layer w0.254: 13.081,11.176 14.097,12.192 14.859,12.192 ; U2.48 14.937,12.27 14.859,12.192 ; U2.1 14.859,12.192 ; U2.36 16.637,22.606 ; 29.718,35.56 30.293,34.985 U3.25
  Top Layer w0.381: P8.1 P9.1 ; U2.24@24.003,19.44 C19.1 v2@24.003,22.543 ; R2.1@24.384,51.308 R2.1 26.543,51.054 26.924,51.435 26.924,55.245 27.559,55.88 31.242,55.88 31.623,55.499 31.623,52.07 32.004,51.689 R26.2 ; R29.1@36.83,19.603 R29.1
  Top Layer w0.508: P5.1 16.256,22.987 16.637,22.606 ; C23.1@11.049,11.176 v2(11.938,11.176) 13.081,11.176 ; U1.2 16.51,47.879 C21.1 ; v2(21.209,33.851) R17.2 ; R2.1@24.384,51.308 19.939,51.308 C21.1 ; C18.1 25.4,42.799 C21.1 ; v2(28.067,35.56) 29.718,35.56 ; R19.1 v2(30.861,2.413) L4.1@32.385,2.413 ; L4.1 34.29,1.016 45.085,1.016 P13.9 47.244,1.651 56.261,1.651 R33.2 ; v2(36.83,18.288) 36.854,18.312 R29.1 ; R33.2@56.261,1.905 R33.2@56.515,2.159
  Bottom Layer w0.381: P1.2@1.905,51.181 P1.2 ; v2(10.541,19.05) 10.541,22.733 P5.1@10.795,22.733
  Bottom Layer w0.508: P1.2 17.018,51.181 C21.1 21.222,46.977 21.222,33.909 26.416,33.909 v2(28.067,35.56) ; P9.1 6.189,18.288 10.541,18.288 ; v2(10.541,19.05) 10.541,18.288 ; P5.1 10.795,22.733 10.858,22.669 21.209,22.669 ; v2(21.209,33.851) 21.209,22.669 ; v2(30.861,2.413) 15.367,2.413 13.716,4.064 13.716,9.398 v2(11.938,11.176) 10.541,12.573 10.541,18.288 ; v2(36.83,18.288) 32.448,22.669 v2(23.876,22.669) 21.209,22.669
VMID: C24.1 R1.2 R12.2 U3.14 | length 27.9
  Top Layer w0.305: U3.14 39.384,32.879
  Top Layer w0.508: v2(39.751,32.752) 42.277,30.226 R12.2 C24.1 ; v2(43.815,45.466) 44.831,44.45 R1.2
  Bottom Layer w0.508: v2(39.751,32.752) 39.751,43.006 42.211,45.466 v2(43.815,45.466)
XTAL1: C32.2 U3.19 X2.2 | length 12.5
  Top Layer w0.254: U3.19 33.893,38.719 35.052,39.878 C32.2 35.052,45.339 X2.2
XTAL2: C28.2 U3.20 X2.1 | length 12.4
  Top Layer w0.254: X2.1 32.385,45.212 C28.2 32.385,39.763 33.393,38.755 U3.20
pads on no net: CH1.4 CH1.5 CH1.6 J1.0 P3.1 P3.2 P4.1 P4.2 P4.3 P4.4 P7.1 P7.2 P14.9 U1.4 U2.32 U2.33

## Polygon pours and split planes (outlines as drawn)
GND on Bottom Layer "BottomLayerGND" (hatched 90Degree grid 0.254 track 0.254, remove dead copper, pour order 3): 0,62.488 2.644,65.151 62.713,65.151 62.738,65.126 62.607,64.994 62.607,0.762 2.62,0.762 0,3.4 0,62.488
GND on Top Layer "GND_L01_P009" (hatched 45Degree grid 0.15 track 0.203, remove dead copper, pour order 9): 2.667,65.278 0.635,63.246 0.635,61.468 0.635,2.667 2.54,0.762 62.484,0.762 62.738,1.016 62.738,64.897 62.357,65.278 2.667,65.278

## Keep-outs
Keep-Out Layer:
  lines w0.254: 67.183,0.127 131.699,0.127 ccw(c131.636,2.095) 133.604,2.159 ; 69.596,0.127 66.548,0.127 2.032,0.127 cw(c2.032,2.159) 0,2.159 0,65.913 cw(c2.286,65.913) 2.286,68.199 66.802,68.199 131.826,68.199 cw(c131.826,66.421) 133.604,66.421 133.604,1.905

## Other copper
Top Layer:
  rectangle: 123.816,58.985 129.816,64.985
  rectangle net GND: 39.497,35.306 59.436,36.576
  rectangle: 123.816,52.785 129.816,58.785
  rectangle: 123.816,3.185 129.816,9.185
  rectangle: 123.816,9.385 129.816,15.385
  rectangle: 123.816,15.585 129.816,21.585
  rectangle: 123.816,21.785 129.816,27.785
  rectangle: 123.816,27.985 129.816,33.985
  rectangle: 123.816,34.185 129.816,40.185
  rectangle: 123.816,40.385 129.816,46.385
  rectangle: 123.816,46.585 129.816,52.585
  rectangle: 68.016,58.985 74.016,64.985
  rectangle: 68.016,52.785 74.016,58.785
  rectangle: 68.016,3.185 74.016,9.185
  rectangle: 68.016,9.385 74.016,15.385
  rectangle: 68.016,15.585 74.016,21.585
  rectangle: 68.016,21.785 74.016,27.785
  rectangle: 68.016,27.985 74.016,33.985
  rectangle: 68.016,34.185 74.016,40.185
  rectangle: 68.016,40.385 74.016,46.385
  rectangle: 68.016,46.585 74.016,52.585
  rectangle: 74.216,58.985 80.216,64.985
  rectangle: 74.216,52.785 80.216,58.785
  rectangle: 74.216,3.185 80.216,9.185
  rectangle: 74.216,9.385 80.216,15.385
  rectangle: 74.216,15.585 80.216,21.585
  rectangle: 74.216,21.785 80.216,27.785
  rectangle: 74.216,27.985 80.216,33.985
  rectangle: 74.216,34.185 80.216,40.185
  rectangle: 74.216,40.385 80.216,46.385
  rectangle: 74.216,46.585 80.216,52.585
  rectangle: 80.416,58.985 86.416,64.985
  rectangle: 80.416,52.785 86.416,58.785
  rectangle: 80.416,3.185 86.416,9.185
  rectangle: 80.416,9.385 86.416,15.385
  rectangle: 80.416,15.585 86.416,21.585
  rectangle: 80.416,21.785 86.416,27.785
  rectangle: 80.416,27.985 86.416,33.985
  rectangle: 80.416,34.185 86.416,40.185
  rectangle: 80.416,40.385 86.416,46.385
  rectangle: 80.416,46.585 86.416,52.585
  rectangle: 86.616,58.985 92.616,64.985
  rectangle: 86.616,52.785 92.616,58.785
  rectangle: 86.616,3.185 92.616,9.185
  rectangle: 86.616,9.385 92.616,15.385
  rectangle: 86.616,15.585 92.616,21.585
  rectangle: 86.616,21.785 92.616,27.785
  rectangle: 86.616,27.985 92.616,33.985
  rectangle: 86.616,34.185 92.616,40.185
  rectangle: 86.616,40.385 92.616,46.385
  rectangle: 86.616,46.585 92.616,52.585
  rectangle: 92.816,58.985 98.816,64.985
  rectangle: 92.816,52.785 98.816,58.785
  rectangle: 92.816,3.185 98.816,9.185
  rectangle: 92.816,9.385 98.816,15.385
  rectangle: 92.816,15.585 98.816,21.585
  rectangle: 92.816,21.785 98.816,27.785
  rectangle: 92.816,27.985 98.816,33.985
  rectangle: 92.816,34.185 98.816,40.185
  rectangle: 92.816,40.385 98.816,46.385
  rectangle: 92.816,46.585 98.816,52.585
  rectangle: 99.016,58.985 105.016,64.985
  rectangle: 99.016,52.785 105.016,58.785
  rectangle: 99.016,3.185 105.016,9.185
  rectangle: 99.016,9.385 105.016,15.385
  rectangle: 99.016,15.585 105.016,21.585
  rectangle: 99.016,21.785 105.016,27.785
  rectangle: 99.016,27.985 105.016,33.985
  rectangle: 99.016,34.185 105.016,40.185
  rectangle: 99.016,40.385 105.016,46.385
  rectangle: 99.016,46.585 105.016,52.585
  rectangle: 117.616,58.985 123.616,64.985
  rectangle: 117.616,52.785 123.616,58.785
  rectangle: 117.616,3.185 123.616,9.185
  rectangle: 117.616,9.385 123.616,15.385
  rectangle: 117.616,15.585 123.616,21.585
  rectangle: 117.616,21.785 123.616,27.785
  rectangle: 117.616,27.985 123.616,33.985
  rectangle: 117.616,34.185 123.616,40.185
  rectangle: 117.616,40.385 123.616,46.385
  rectangle: 117.616,46.585 123.616,52.585
  rectangle: 105.216,46.585 111.216,52.585
  rectangle: 105.216,40.385 111.216,46.385
  rectangle: 105.216,34.185 111.216,40.185
  rectangle: 105.216,27.985 111.216,33.985
  rectangle: 105.216,21.785 111.216,27.785
  rectangle: 105.216,15.585 111.216,21.585
  rectangle: 105.216,9.385 111.216,15.385
  rectangle: 105.216,3.185 111.216,9.185
  rectangle: 105.216,52.785 111.216,58.785
  rectangle: 105.216,58.985 111.216,64.985
  rectangle: 111.416,46.585 117.416,52.585
  rectangle: 111.416,40.385 117.416,46.385
  rectangle: 111.416,34.185 117.416,40.185
  rectangle: 111.416,27.985 117.416,33.985
  rectangle: 111.416,21.785 117.416,27.785
  rectangle: 111.416,15.585 117.416,21.585
  rectangle: 111.416,9.385 117.416,15.385
  rectangle: 111.416,3.185 117.416,9.185
  rectangle: 111.416,52.785 117.416,58.785
  rectangle: 111.416,58.985 117.416,64.985
  pour cut-out: 14.986,46.736 15.748,46.736 15.748,43.688 17.526,43.688 17.526,42.926 14.986,42.926
  pour cut-out: 39.37,48.387 62.992,48.387 62.992,25.908 39.37,25.908
  pour cut-out: 41.148,23.749 41.148,22.684 41.172,22.66 41.148,22.636 41.148,22.225 56.642,22.225 56.769,22.352 56.769,23.749

## Silkscreen, mask and mechanical layers (free items; w line width, h text height)
Top Overlay:
  text "10_27" at 57.15,64.135 h0.76
  text "FSV9563 DEMO V1.1" at 39.37,64.008 h0.89
  text "G118" at 52.832,64.008 h0.89
  text "SCL" at 30.861,53.848 h0.89
  text "CLKOUT" at 30.734,49.276 h0.89
  text "SGO" at 38.632,23.315 h0.89